# Altium PCB PCB_POWER.PcbDoc (part 3 of 3)
Units mil, origin at the board's own origin, x right, y up, seen from the top; angles counter-clockwise.
Board outline 4410 x 2400 mil, 2 copper layers (Top Layer, Bottom Layer), stack 65.792 mil thick; 97 components, 67 nets, 301 pads, 107 vias.
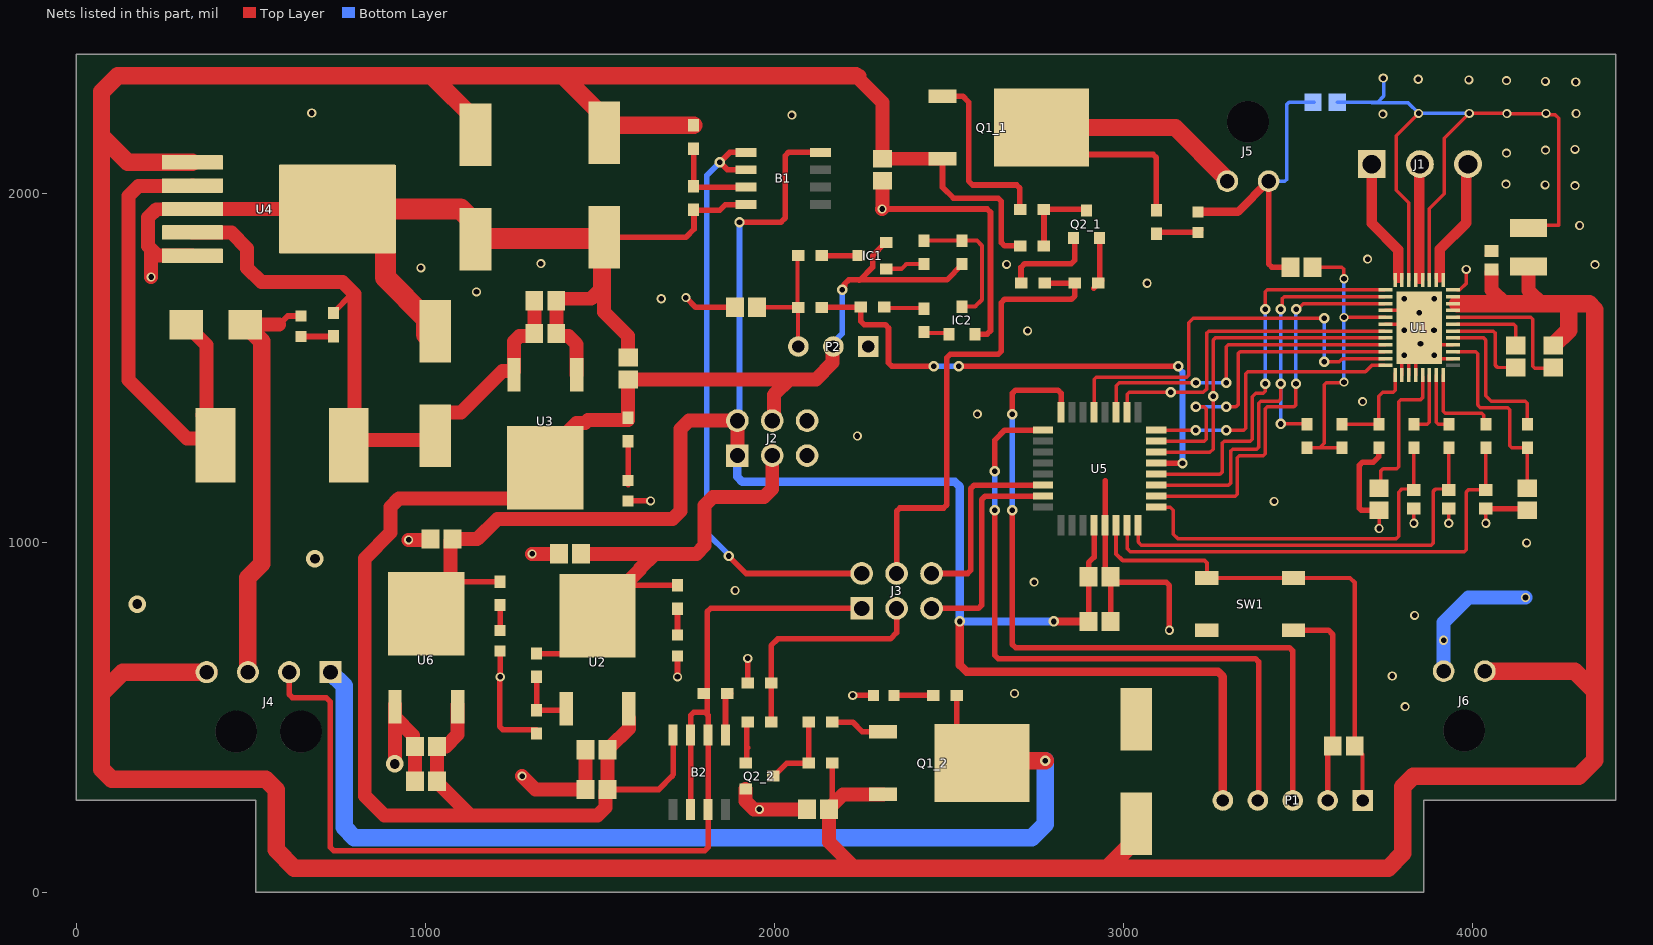
[diagram p2: the nets of this part, all layers, seen from the top]

## Via types
v1: diameter 26, hole 16, Top Layer to Bottom Layer, tented both sides, 70 vias
v2: diameter 30, hole 16, Top Layer to Bottom Layer, 32 vias
v3: diameter 50, hole 28, Top Layer to Bottom Layer, tented both sides, 3 vias
v4: diameter 26, hole 16, Top Layer to Bottom Layer, 2 vias

## Nets (pads, with @x,y where several pads share a name; then routed paths per layer and width w, separated by ;. In a path a pad name is that pad's centre, name@x,y a point inside that pad or via, vN(x,y) a via of type N, cw(c..) or ccw(c..) an arc to the next point about the centre after c; other vN are vias at no path point)
3V: C13.1 J2.3 R9.2 R10.2 U2.4 | length 1493.1
  Top Layer w16: R10.2@1318.9,683.12 1392.25,683.12 1493.5,784.37 U2.4@1493.5,791.39 ; U2.4@1525,879.38 1525.98,878.4 R9.2@1722.49,878.4
  Top Layer w40: C13.1@1446.26,968.75 1657.87,968.75 ; U2.4@1493.5,791.39 1525,822.88 1525,879.38 1571.26,879.38 1615.52,923.64 1615.52,926.4 1657.87,968.75 ; J2.3@1993.75,1261.53 1993.75,1154.68 1970.32,1131.25 1823.43,1131.25 1800,1107.82 1800,992.18 1776.57,968.75 1657.87,968.75
3V3: B1.8 C16.1 C27.2 C28.2 J2.1 J2.2 P1.5 R12.2 U5.4 U6.4 | length 5450
  Top Layer w16: U6.4@1056.82,875.21 1070.89,889.28 1198.66,889.28 ; v2(1900,1918.75) 2018.75,1918.75 2031.25,1931.25 2031.25,2109.38 2040.62,2118.75 B1.8@2131.73,2118.75 ; C28.2@2899.75,774.99 2899.75,887.5 2899.75,943.75 2915.5,959.5 U5.4@2915.5,1050.5
  Top Layer w24: v2(2531.25,775) 2531.25,650 2550,631.25 3270.44,631.25 3284.5,617.19 P1.5@3284.5,270.29 ; v2(2800,775) C28.2@2899.9,774.99
  Top Layer w40: U6.4@1070.89,889.28 1072.28,890.68 1072.28,1005.3 C16.1@1077.87,1010.89 1148.92,1010.89 1206.34,1068.31 1707.82,1068.31 1731.25,1091.74 1731.25,1326.57 1754.68,1350 J2.2@1893.75,1350 J2.1@1893.75,1237.52
  Bottom Layer w16: v2(1900,1918.75) 1900,1363.31 J2.2@1909.37,1353.94
  Bottom Layer w24: J2.1@1893.75,1250 1893.75,1189.06 1907.81,1175 2517.19,1175 2531.25,1160.94 v2(2531.25,775) v2@2798.38,775
5V: B2.4 C11.1 C12.1 C14.1 C15.1 C19.1 IC1.2 J2.4 P2.2 R13.2 R20.2 U2.3 U3.4 U6.3 | length 5000.1
  Top Layer w16: C11.1@1521.8,293.75 1668.77,293.75 1707.2,332.18 ; 1709.99,337.5 B2.4@1709.99,450.48 B2.4@1709.99,462.98 ; v2(2193.75,1725) 2193.75,1728.79 2200.6,1735.64 2200.6,1741.3 2212.85,1753.54 2245.2,1753.54 ; 2243.45,1751.8 2245.2,1753.54 ; IC1.2@2320.47,1859.84 2318.5,1859.84 2281.1,1822.44 2281.1,1789.44 2245.2,1753.54 ; R20.2@2537.5,1798.82 2537.5,1796.85 2494.19,1753.54 2245.2,1753.54
  Top Layer w40: U6.3@1092.39,535.74 1092.39,450.65 1058.88,417.14 C15.1@1034.12,417.14 C14.1@1034.12,317.14 1034.12,315.17 1092.39,256.9 1092.39,255.91 1129.45,218.85 ; U2.3@1583.27,496.82 1583.27,469.03 1529.36,415.12 1527.39,415.12 1521.8,409.53 C12.1@1521.8,407.56 C11.1@1521.8,293.75 1516.21,288.16 1516.21,242.28 1492.78,218.85 1129.45,218.85 ; J2.4@1993.75,1350 1998.53,1354.78 1998.53,1424.39 2042.64,1468.5 ; P2.2@2166.88,1562.5 2166.88,1516.88 2118.5,1468.5 2042.64,1468.5 ; 1129.45,218.85 883.51,218.85 826.77,275.59 826.77,955.26 900.68,1029.17 900.68,1103.42 924.11,1126.85 1265.39,1126.85 1343.75,1205.22 U3.4@1343.75,1214.86 1343.75,1254.43 1433,1343.68 1457.61,1343.68 1466.14,1352.21 1581.25,1352.21 R13.2@1581.25,1358.46 C19.1@1581.25,1468.5 2042.64,1468.5
  Bottom Layer w16: P2.2@2168.75,1562.5 2168.75,1574.15 2193.75,1599.15 v2(2193.75,1725)
12V: C17.1 C18.1 C20.1 L1.2 R14.2 U3.3 U4.4 | length 1881
  Top Layer w16: R14.2@737.5,1658.46 737.5,1660.43 789.57,1712.5 796.95,1712.5
  Top Layer w40: U4.4@333.22,1889.32 333.89,1888.65 445.06,1888.65 489.96,1843.75 489.96,1787.89 531.25,1746.6 762.84,1746.6 796.95,1712.5 L1.2@796.95,1316.44 ; L1.2@781.07,1279.64 796.28,1294.84 C20.1@1034.21,1294.84 ; C20.1@1037.83,1308.9 1037.83,1357.09 1054.05,1373.31 1102.25,1373.31 1220.71,1491.77 1253.08,1491.77 1253.99,1492.68 1253.99,1576.57 1269.86,1592.44 1306.66,1592.44 1312.25,1598.03 C18.1@1312.25,1600 C17.1@1312.25,1693.75 C17.1@1312.25,1699.31
AVDD: C8.1 R8.2 R27.2 U1.25 | length 879.2
  Top Layer w10: R27.2@3525,1272.79 3562.5,1272.79 ; C8.1@3541.1,1789.79 3625.32,1789.79 3631.17,1783.93 v4(3631.17,1756.5) ; R8.2@3625,1272.79 3562.5,1272.79 ; v1(3631.17,1460.5) 3629.3,1458.63 3580.86,1458.63 3575,1452.77 3575,1285.29 3562.5,1272.79 ; v4(3631.17,1646.03) U1.25@3749.9,1646.03
  Bottom Layer w10: v1(3631.17,1460.5) v4(3631.17,1646.03) v4(3631.17,1756.5)
BLDC_E: R23.1 R24.1 U5.13 | length 1517.4
  Top Layer w16: R23.1@2133.46,1675 R24.1@2231.25,1675 ; R24.1@2247.64,1675 2247.64,1634.37 2257.01,1625 2317.35,1625 2326.73,1615.63 2326.73,1515.62 2336.1,1506.25 v2(2456.59,1506.25) ; v2(2527.66,1506.25) v2(3156.25,1506.25) ; U5.13@3093.25,1228.25 v2(3168.75,1228.25)
  Bottom Layer w16: v2(2456.59,1506.25) v2(2527.66,1506.25) ; v2(3156.25,1506.25) 3156.25,1502.46 3168.75,1489.96 v2(3168.75,1228.25)
DRVOUT: C29.2 P2.3 R21.2 R23.2 | length 377.1
  Top Layer w12: C29.2@1950.25,1675 R23.2@2066.54,1675 ; R21.2@2066.54,1822.44 R23.2@2066.54,1675 ; P2.3@2068.75,1562.5 2067.64,1563.61 2067.64,1673.89 R23.2@2066.54,1675
FAULT: R27.1 U1.22 U5.11 | length 1360.6
  Top Layer w10: U5.11@3093.25,1165.26 3300.39,1165.26 3306.25,1171.11 3306.25,1262.89 3312.11,1268.75 3381.64,1268.75 3387.5,1274.61 3387.5,1400.39 3393.36,1406.25 3444.14,1406.25 3450,1412.11 v2(3450,1456.25) ; v2(3450,1340.7) 3524.02,1340.7 R27.1@3525,1339.71 ; v2(3450,1669.71) 3453.83,1673.53 3453.83,1699.25 3459.68,1705.11 U1.22@3745.9,1705.11
  Bottom Layer w10: v2(3450,1340.7) v2(3450,1456.25) v2(3450,1669.71)
FB_BK: C1.1 R4.2 U1.3 | length 576.4
  Top Layer w10: U1.3@3956.25,1547.59 4008.02,1547.59 4013.88,1541.73 4013.88,1395.06 4021.44,1387.5 4100.39,1387.5 4106.25,1381.64 4106.25,1278.64 4112.11,1272.79 R4.2@4156.25,1272.79 C1.1@4156.25,1156.5
GND: *5.2 B1.4 C1.2 C6.1 C7.1 C8.2 C9.2 C10.1 C11.2 C12.2 C13.2 C14.2 C15.2 C16.2 C17.2 C18.2 C19.2 C20.2 C21.2 C22.2 C23.2 C25_1.2 C25_2.2 C26.1 C27.1 C28.1 C29.1 D1.2 D2.2 D3.2 D4.1 D5.2 D6_1.2 D6_2.2 IC2.2 J2.5 J2.6 J4.3 J5.2 J6.2 P1.2 P2.1 Q2_1.2 Q2_2.2 R2.1 R11.2 R19_1.2 R19_2.2 R26.2 SW1.3 SW1.4 U1.2 U1.4 U1.24 U1.26 U1.34 U1.35 U1.36 U1.41 U3.1 U4.3 U4.5 U4.6 U5.5 U6.1 | length 11484.1
  Top Layer w10: v1(3731.95,1041.39) C9.2@3731.95,1091.77 ; U1.26@3749.9,1626.34 U1.41@3836.56,1626.34 ; U1.24@3749.9,1665.72 3797.18,1665.72 U1.41@3836.56,1626.34 ; U1.34@3797.18,1480.5 3797.18,1567.28 U1.41@3816.87,1586.97 ; U1.35@3816.87,1480.5 U1.41@3816.87,1586.97 ; v1(3831.25,1056.25) C10.1@3831.25,1098.43 ; U1.36@3836.56,1480.5 3836.56,1606.66 U1.41@3816.87,1586.97 ; v1(3931.25,1056.25) C7.1@3931.25,1098.43 C7.1@3931.25,1100.93 ; U1.2@3942.9,1527.89 3906.4,1527.89 3846.4,1587.89 U1.41@3846.4,1616.5 ; U1.4@3942.9,1567.28 3895.63,1567.28 U1.41@3846.4,1616.5 ; C6.1@4030.77,1086.52 4036.76,1086.52 4037.56,1085.71 v1(4037.56,1056.25) ; U1.41@3836.56,1626.34 U1.41@3846.4,1616.5
  Top Layer w16: 581.25,1625 606.25,1650 D5.2@643.75,1650 ; v1@1213.02,607.01 1213.02,474.3 1222.39,464.92 R11.2@1317.79,464.92 ; v1(1214.73,616.45) D2.2@1214.73,686.02 ; C23.2@1512.5,1875.39 1746.36,1875.39 1769.73,1898.77 1769.73,1953.05 1843.75,1953.05 1859.45,1968.75 B1.4@1918.27,1968.75 ; D3.2@1578.25,1120.18 D3.2@1581.25,1120.18 v1(1645.4,1120.18) ; v1(1722.49,616.39) D1.2@1722.49,670.47 ; v1(1746.36,1702.56) 1773.92,1675 C29.1@1887.25,1675 ; R19_2.2@1923.52,598.38 v1(1923.52,669.29) ; v1(2224.41,563.43) D6_2.2@2283.76,563.43 ; v1(2308.66,1956.25) 2609.38,1956.25 2618.75,1946.88 2618.75,1607.5 2609.38,1598.13 IC2.2@2574.9,1598.13 ; R19_1.2@2914.06,1728.76 2929.06,1743.76 2929.18,1743.76 2936.93,1751.51 2936.93,1751.63 2931.15,1745.85 Q2_1.2@2931.15,1873.13 ; 2947,1178.25 U5.5@2947,1050.5 2947,903.25 C27.1@2962.75,887.5 ; C28.1@2975.24,774.99 2962.75,762.5 C27.1@2962.75,887.5 ; v1(3131.25,750) 3131.25,878.13 3121.88,887.5 C27.1@2962.75,887.5 ; J5.2@3415.31,2036.17 3415.31,1799.17 3424.68,1789.79 C8.2@3460.29,1789.79 ; SW1.3@3486.52,750.2 3586.65,750.2 3599.12,737.73 C26.1@3599.12,418.7 3584.5,404.08 P1.2@3584.5,262.45 ; C9.2@3731.25,1093.5 3681.14,1093.5 3675,1099.64 3675,1221.88 3684.37,1231.25 3715.31,1231.25 3731.25,1247.19 R26.2@3731.25,1272.79 ; C6.1@4037.5,1098.43 4151.33,1098.43 C1.2@4156.25,1093.5
  Top Layer w24: D6_1.2@3213.48,1948.28 3327.41,1948.28 J5.2@3415.31,2036.17
  Top Layer w40: v1(215.09,1761.58) 215.09,1841.16 ; U4.5@333.22,1822.39 332.55,1823.06 233.19,1823.06 215.09,1841.16 ; D4.1@485.33,1625 490.55,1625 581.25,1625 ; U4.6@748.57,1956.25 U4.3@333.22,1956.25 332.55,1955.58 229.68,1955.58 206.25,1932.15 206.25,1850 215.09,1841.16 ; v3(912.86,367.14) U6.1@912.86,501.54 ; U6.1@912.86,535.74 U6.1@912.86,501.54 ; v1(952.63,1008.92) 1012.91,1008.92 C16.2@1014.88,1010.89 ; C14.2@971.13,317.14 C15.2@971.13,417.14 965.54,422.73 965.54,448.86 U6.1@912.86,501.54 ; v1(1277.63,332.2) 1316.08,293.75 C11.2@1458.81,293.75 C12.2@1458.81,407.56 ; v1(1306.25,968.75) C13.2@1383.27,968.75 C13.2@1388.86,974.34 ; U3.1@1433.51,1481.79 1433.51,1569.01 1410.08,1592.44 1380.84,1592.44 1375.25,1598.03 C18.2@1375.25,1600 C17.2@1375.25,1693.75 1375.25,1699.31 1474.31,1699.31 1500.83,1725.83 1500.83,1863.72 1509.38,1872.27 C23.2@1512.5,1875.39 1512.5,1661.19 1581.25,1592.44 C19.2@1581.25,1531.5 ; Q2_2.2@1917.62,294.78 1917.62,260.45 1941.05,237.02 v1(1956.99,237.02) 2093.02,237.02 C25_2.2@2093.5,237.5 ; v1(2308.66,1956.25) 2309.83,1957.42 C25_1.2@2309.83,2037.25
  Top Layer w50: D4.1@484.65,1625 D4.1@485.33,1625 ; D4.1@490.55,1625 507.87,1607.68 507.87,1601.77 531.5,1578.15 531.5,939.99 492.13,900.62 J4.3@492.13,629.79
  Top Layer w60: U4.6@748.57,1956.25 U4.6@788.93,1956.25 ; C20.2@1004.22,1596.95 1004.22,1641.24 885.9,1759.56 885.9,1859.28 U4.6@788.93,1956.25 ; C23.2@1509.38,1872.27 1146.88,1872.27 C21.2@1143.75,1869.14 1143.75,1913.44 1100.94,1956.25 U4.6@788.93,1956.25
  Bottom Layer w10: J5.2@3415.31,2036.17 3462.01,2036.17 3467.86,2042.03 3467.86,2256.71 3473.72,2262.57 *5.2@3542.5,2262.57 *5.2@3546.25,2262.57
  Bottom Layer w40: J6.2@3916.57,622.42 J6.2@3916.57,632.58 v1(3916.57,721.25) 3916.57,772.07 3988.26,843.75 v1(4151.05,843.75)
  other v1: 3806.25,531.25 2687.5,568.75 3769.45,618.75 3833.43,792.5 1887.5,863.63 2743.75,887.5 4154.05,1000 3431.25,1118.75 2237.5,1306.25 2581.25,1368.75 3684.37,1404.61 3803.4,1537.45 3889.63,1536.89 3850.4,1570.89 2725,1607.5 3803.9,1609 3888.9,1609 3846.4,1659 1675.89,1699.31 3803.9,1699.11 3889.63,1699.11 1146.88,1719 3067.6,1743.76 987.5,1787.5 2665.1,1797.83 1331.25,1800 2050,2225 675,2231.25
  other v3: 175,825 683.88,954.64
HUM: J4.1 Q1_2.2 R17_2.1 | length 3085.4
  Top Layer w16: R17_2.1@2521.75,563.43 2521.75,442.42 Q1_2.2@2594.49,369.68
  Top Layer w50: Q1_2.2@2594.49,369.68 2600.74,375.93 v2(2775.74,375.93)
  Bottom Layer w50: J4.1@728.35,629.79 767.72,590.42 767.72,185.54 797.01,156.25 2737.5,156.25 2775,193.75 v2@2775,375.93
ILIM: C9.1 U1.37 | length 426.6
  Top Layer w10: C9.1@3737.11,1154.43 3737.11,1161.32 3737.11,1206.64 3742.96,1212.5 3781.64,1212.5 3787.5,1218.36 3787.5,1404.61 3793.36,1410.47 3850.39,1410.47 3856.25,1416.33 U1.37@3856.25,1475.61
MODE: R8.1 R26.1 U1.33 | length 289
  Top Layer w10: R8.1@3625,1339.71 R26.1@3731.25,1339.71 3731.25,1420.18 3742.32,1431.25 3771.63,1431.25 3777.49,1437.11 U1.33@3777.49,1486.12
NetB1_3: B1.3 R1.1 R2.2 | length 258.5
  Top Layer w16: R1.1@1768.75,2129.04 R2.2@1768.75,2020.96 1770.96,2018.75 B1.3@1918.27,2018.75
NetB2_1: B2.1 R3.2 | length 128.5
  Top Layer w16: B2.1@1859.99,450.48 1859.99,561.05 1867.69,568.75 R3.2@1874.7,568.75
NetC2_1: C2.1 U1.7 | length 224.1
  Top Layer w10: U1.7@3956.25,1626.34 4116.98,1626.34 4122.83,1620.49 C2.1@4122.83,1565.39
NetC2_2: C2.2 U1.6 | length 264
  Top Layer w10: U1.6@3956.25,1606.66 4059.2,1606.66 4065.06,1600.8 4065.06,1508.26 4070.92,1502.4 C2.2@4122.83,1502.4
NetC6_2: C6.2 R5.2 U5.7 | length 1383.8
  Top Layer w10: U5.7@3009.99,1050.5 3009.99,984 3018.99,975 3975.39,975 3981.25,980.86 3981.25,1145.72 3987.11,1151.57 C6.2@4037.5,1151.57 ; C6.2@4037.56,1156.4 R5.2@4037.56,1272.79
NetC7_2: C7.2 R6.2 U5.8 | length 1218.4
  Top Layer w10: U5.8@3041.49,1050.5 3041.49,1002.75 3050.49,993.75 3112.5,993.75 3881.25,993.75 3887.5,1000 3887.5,1148.57 3893.36,1154.43 C7.2@3933.56,1154.43 ; C7.2@3931.25,1151.57 R6.2@3931.25,1272.79
NetC10_2: C10.2 R7.2 U5.9 | length 1069.1
  Top Layer w10: U5.9@3093.25,1102.26 3133.25,1102.26 3142.25,1093.26 3142.25,1025 3154.75,1012.5 3781.25,1012.5 3787.5,1018.75 3787.5,1144.94 3796.99,1154.43 C10.2@3831.25,1154.43 ; C10.2@3831.25,1151.57 R7.2@3831.25,1272.79
NetD1_1: D1.1 R9.1 | length 75.7
  Top Layer w16: D1.1@1722.49,735.78 R9.1@1722.49,811.47
NetD2_1: D2.1 R12.1 | length 77.3
  Top Layer w16: D2.1@1214.73,750.64 R12.1@1214.73,827.92
NetD3_1: D3.1 R13.1 | length 123.5
  Top Layer w16: D3.1@1581.25,1167.03 R13.1@1581.25,1290.55
NetD4_2: D4.2 L1.1 U4.2 | length 1503.4
  Top Layer w40: D4.2@315.35,1625 321.26,1625 343.58,1602.68 343.58,1596.77 374.02,1566.34 L1.1@374.02,1292.92 ; U4.2@333.22,2023.18 332.55,2022.51 178.76,2022.51 150,1993.75 150,1466.43 317.22,1299.21 362.1,1299.21 L1.1@399.18,1279.64 ; L1.1@362.1,1365.94 406.28,1321.75 L1.1@406.28,1286.74
NetD5_1: D5.1 R14.1 | length 94
  Top Layer w16: D5.1@643.75,1590.94 644.05,1591.24 737.2,1591.24 R14.1@737.5,1591.54
"NetD6_U_PowerOut 11_1": D6_1.1 R17_1.2 | length 130.8
  Top Layer w16: R17_1.2@3093.75,1889.22 D6_1.1@3213.48,1889.22 ; D6_1.1@3213.69,1889.02 3213.69,1889.42 D6_1.1@3221.23,1896.97
"NetD6_U_PowerOut 12_1": D6_2.1 R17_2.2 | length 112
  Top Layer w16: D6_2.1@2342.81,563.43 R17_2.2@2454.82,563.43
NetIC1_1: IC1.1 R22.2 | length 114.3
  Top Layer w12: IC1.1@2320.47,1785.04 2363.97,1785.04 2377.75,1798.82 R22.2@2429.04,1798.82
NetIC1_3: IC1.3 R21.1 | length 108.3
  Top Layer w16: R21.1@2135.16,1822.44 IC1.3@2243.45,1822.44
NetIC2_1: IC2.1 R25.2 | length 73.5
  Top Layer w12: R25.2@2429.04,1604.04 2431.99,1601.08 2497.15,1601.08 IC2.1@2500.1,1598.13
NetIC2_3: IC2.3 R20.1 R22.1 | length 391.3
  Top Layer w12: R22.1@2429.04,1865.75 R20.1@2537.5,1865.75 2579.82,1865.75 2594.59,1850.98 2594.59,1696.56 2574.9,1676.87 IC2.3@2537.5,1676.87
NetJ5_1: J5.1 Q1_1.2 R17_1.1 | length 1230.4
  Top Layer w16: Q1_1.2@2703.05,2189.73 2780.28,2112.5 3084.38,2112.5 3093.75,2103.13 R17_1.1@3093.75,1957.66
  Top Layer w50: Q1_1.2@2703.05,2189.73 3147.77,2189.73 3291.19,2046.31 3291.19,2045.42 J5.1@3298.21,2038.4
"NetQ1_U_PowerOut 11_1": Q1_1.1 R16_1.2 | length 517.3
  Top Layer w16: Q1_1.1@2481.25,2279.49 2539.26,2279.49 2556.25,2262.5 2556.25,2036.45 2567.7,2025 2693.68,2025 2703.05,2015.63 R16_1.2@2703.05,1961.81
"NetQ1_U_PowerOut 12_1": Q1_2.1 R16_2.2 | length 157.1
  Top Layer w16: R16_2.2@2165.45,486.61 2224.41,486.61 2251.97,459.06 2310.63,459.06 Q1_2.1@2311.02,459.45
"NetQ2_U_PowerOut 11_1": Q2_1.1 R18_1.2 | length 272.1
  Top Layer w16: R18_1.2@2706.25,1743.76 2706.25,1789.29 2716.97,1800 2850.33,1800 2859.7,1809.37 Q2_1.1@2859.7,1874.21
"NetQ2_U_PowerOut 11_3": Q2_1.3 R15_1.2 R16_1.1 | length 228.5
  Top Layer w16: R15_1.2@2771.95,1848.88 2771.95,1955.59 Q2_1.3@2893.75,1955.59
"NetQ2_U_PowerOut 12_1": Q2_2.1 R18_2.2 | length 121.4
  Top Layer w16: Q2_2.1@1917.62,369.59 1920.57,372.54 1920.57,483.66 R18_2.2@1923.52,486.61 ; 1921.9,413.34 1923.87,413.34
"NetQ2_U_PowerOut 12_3": Q2_2.3 R15_2.2 R16_2.1 | length 234.6
  Top Layer w16: Q2_2.3@1996.36,332.18 1998.33,332.18 2034.89,368.75 2097.59,368.75 R15_2.2@2098.52,369.68 R16_2.1@2098.52,486.61
NetR10_1: R10.1 R11.1 U2.1 | length 181.7
  Top Layer w16: R10.1@1318.9,616.19 R11.1@1318.9,520.96 1399.85,520.96 U2.1@1403.74,524.85
NetR24_2: R24.2 R25.1 | length 116.1
  Top Layer w12: R24.2@2314.57,1675 2316.58,1672.98 2427.02,1672.98 R25.1@2429.04,1670.96
NetU1_21: U1.21 U5.12 | length 1158
  Top Layer w10: U5.12@3093.25,1196.75 3276.08,1196.75 3281.94,1202.61 3281.94,1285.38 3287.8,1291.24 3362.89,1291.24 3368.75,1297.1 3368.75,1418.75 3378.12,1428.12 3400.23,1428.12 3406.09,1433.98 3406.09,1456.09 v2(3406.25,1456.25) ; v2(3406.25,1669.71) 3406.25,1718.94 3412.11,1724.8 U1.21@3745.9,1724.8
  Bottom Layer w10: v2(3406.25,1456.25) v2(3406.25,1669.71)
NetU1_23: U1.23 U5.10 | length 1177.9
  Top Layer w10: U5.10@3093.25,1133.76 3319.14,1133.76 3325,1139.62 3325,1244.14 3330.86,1250 3400.23,1250 3406.09,1255.86 3406.09,1383.64 3411.95,1389.5 3487.89,1389.5 3493.75,1395.36 v2(3493.75,1456.25) ; v2(3493.9,1669.71) 3499.31,1669.71 3515.02,1685.41 U1.23@3745.9,1685.41
  Bottom Layer w10: v2(3493.75,1456.25) 3493.75,1669.56 v2(3493.9,1669.71)
NetU1_27: U1.27 U5.18 | length 956
  Top Layer w10: U5.18@3009.99,1374.5 3009.99,1425.39 3015.85,1431.25 v2(3134.65,1431.25) 3228.58,1431.25 3237.5,1440.17 3237.5,1600.8 3243.36,1606.66 U1.27@3745.9,1606.66
NetU1_28: U1.28 U5.14 | length 975.2
  Top Layer w10: U5.14@3093.25,1259.74 3247.24,1259.74 3256.25,1268.75 v2(3256.25,1420.07) 3256.25,1581.11 3262.11,1586.97 U1.28@3749.9,1586.97
NetU1_29: U1.29 U5.19 | length 956.6
  Top Layer w10: U5.19@2978.49,1374.5 2978.49,1450.39 2987.1,1459 3206.62,1459 v2(3207.26,1458.37) ; v2(3293.75,1458.37) 3293.75,1561.42 3299.61,1567.28 U1.29@3749.9,1567.28
  Bottom Layer w10: v2(3207.26,1458.37) v2(3293.75,1458.37)
NetU1_30: U1.30 U5.15 | length 953.8
  Top Layer w10: U5.15@3093.25,1291.24 3230.68,1291.24 3236.54,1297.1 3236.54,1383.64 3230.68,1389.5 v2(3207.26,1389.5) ; v2(3293.75,1389.5) 3321.84,1389.5 3327.69,1395.36 3327.69,1541.73 3333.55,1547.59 U1.30@3745.9,1547.59
  Bottom Layer w10: v2(3207.26,1389.5) v2(3293.75,1389.5)
NetU1_31: U1.31 U5.21 | length 1214
  Top Layer w10: U5.21@2915.5,1374.5 2915.5,1469.14 2921.36,1475 3181.27,1475 3187.12,1480.86 3187.12,1630.88 3199.96,1643.71 v2(3575,1643.71) ; v2(3575,1518.75) 3617.91,1518.75 3627.06,1527.89 U1.31@3745.9,1527.89
  Bottom Layer w10: v2(3575,1518.75) v2(3575,1643.71)
NetU1_32: U1.32 U5.16 | length 821
  Top Layer w10: U5.16@3093.25,1322.74 v2(3206.62,1322.74) ; v2(3293.75,1323.1) 3294.11,1322.74 3344.14,1322.74 3350,1328.59 3350,1484.25 3355.86,1490.11 3692.72,1490.11 3710.82,1508.2 U1.32@3745.9,1508.2
  Bottom Layer w10: v2(3206.62,1322.74) 3206.81,1322.92 3293.57,1322.92 v2(3293.75,1323.1)
OA: J1.3 U1.13 U1.14 | length 354.4
  Top Layer w30: 3905.63,1761.5 3905.63,1840.63 3981.25,1916.25 J1.3@3981.25,2084.6
OB: J1.2 U1.16 U1.17 | length 329.6
  Top Layer w30: 3846.4,1756.5 J1.2@3846.4,2086.11
OC: J1.1 U1.19 U1.20 | length 356.7
  Top Layer w30: J1.1@3710.82,2085 3710.82,1915.02 3786.9,1838.95 3786.9,1759.82
PGND: *5.1 C3.1 C4.2 U1.12 U1.15 U1.18 | length 2296.8
  Top Layer w10: 3781.25,2048.57 3781.25,2009.7 3816.87,1974.08 U1.18@3816.87,1752.5 ; 3781.25,2048.61 3781.25,2166.25 v1(3845,2230) ; U1.15@3875.94,1752.5 3875.94,1957.19 3918.75,2000 3918.75,2158.75 v1(3990,2230) 4097.53,2230 4097.82,2229.71 4209.36,2229.71 v1(4209.65,2230) 4212.71,2226.94 4234.78,2226.94 4245.86,2215.86 4245.86,1909.18 ; U1.12@3956.25,1724.8 3963.13,1724.8 3981.25,1742.91 v1(3981.25,1783.43) ; C4.2@4038.88,1823.32 C4.2@4040.88,1825.32 ; C3.1@4130,1885.71 4154.25,1909.96 4245,1909.96
  Bottom Layer w10: *5.1@3612.5,2262.57 3727.57,2262.57 3745,2280 3745,2330 v1(3743.75,2331.25) ; 3710,2260 3815,2260 v1(3845,2230) v1(3990,2230)
  other v1: 4350,1797.08 3698.82,1812.82 4306.1,1909.18 4292.92,2023.45 4207.22,2025.44 4095.32,2027.43 4096.61,2116.43 4208.43,2125.13 4292.92,2127.1 3742.54,2228.01 4097.53,2229.43 4296.1,2229.75 4294.89,2320.04 4208.15,2322.03 4096.61,2324.02 3988.79,2326.01 3843.79,2328.01
PW_F: J3.4 R18_1.1 R19_1.1 | length 1410.3
  Top Layer w16: J3.4@2350,896.91 2350,1090.63 2359.37,1100 2484.38,1100 2493.75,1109.37 2493.75,1530.69 2503.12,1540.06 2640.63,1540.06 2650,1549.43 2650,1688.41 2659.37,1697.79 2850.91,1697.79 2860.29,1707.16 R19_1.1@2860.29,1743.76 R18_1.1@2774.16,1743.76
PW_H: J3.3 R18_2.1 R19_2.1 | length 663.7
  Top Layer w16: R18_2.1@1990.45,486.61 R19_2.1@1990.45,598.38 1990.45,705.86 2009.6,725 2331.99,725 2350,743.01 J3.3@2350,812.5
RST: C26.2 P1.1 SW1.1 SW1.2 U5.6 | length 1457.9
  Top Layer w12: U5.6@2978.49,1050.5 2978.49,968.5 2997.48,949.51 3231.45,949.51 3238.48,942.48 SW1.2@3238.48,899.8 3648.85,899.8 3662.11,886.54 3662.11,416.73 3684.5,394.34 P1.1@3684.5,262.45
RX: J3.5 U5.31 | length 629.5
  Top Layer w16: J3.5@2450,812.5 2584.38,812.5 2593.75,821.87 2593.75,1124.39 2603.12,1133.76 U5.31@2769.25,1133.76
SENT: B2.2 B2.3 B2.6 B2.7 J3.1 J4.2 R3.1 | length 3157.7
  Top Layer w16: J4.2@610.24,629.79 610.24,566.52 619.61,557.15 715.97,557.15 728.35,544.77 728.35,128.12 737.72,118.75 1800.62,118.75 1809.99,128.12 B2.7@1809.99,237.02 B2.2@1809.99,444.95 ; B2.6@1759.99,237.02 B2.3@1759.99,450.48 1759.99,506.18 1769.36,515.55 1800.62,515.55 1807.78,508.39 ; R3.1@1807.73,568.8 1807.73,803.13 1817.1,812.5 J3.1@2270.92,812.5 ; R3.1@1807.78,568.75 1807.78,515.55 1807.78,508.39 ; B2.2@1809.99,450.48 1809.99,506.18 1807.78,508.39
SENV: B1.1 B1.2 J3.2 | length 1754.8
  Top Layer w16: v2(1868.75,962.5) 1918.75,912.5 J3.2@2263.88,912.5 ; B1.2@1918.27,2068.75 1865.29,2068.75 v2(1843.75,2090.29) 1872.21,2118.75 B1.1@1918.27,2118.75
  Bottom Layer w16: v2(1843.75,2090.29) 1806.25,2052.79 1806.25,1028.79 1868.75,966.29 v2(1868.75,962.5)
SOA: R5.1 U1.40 | length 253.7
  Top Layer w10: U1.40@3915.32,1479.76 3915.32,1377.07 3921.17,1371.21 4025.71,1371.21 4031.56,1365.35 4031.56,1336.57 R5.1@4030.77,1335.78
SOB: R6.1 U1.39 | length 173.1
  Top Layer w10: U1.39@3895.63,1480.13 3895.63,1461.5 3895.26,1461.13 3895.26,1345.57 3901.12,1339.71 R6.1@3931.25,1339.71
SOC: R7.1 U1.38 | length 182
  Top Layer w10: R7.1@3831.25,1339.71 3870.08,1339.71 3875.94,1345.57 U1.38@3875.94,1480.5
SW_BK: R4.1 U1.5 | length 431.1
  Top Layer w10: U1.5@3956.25,1586.97 4031.71,1586.97 4037.56,1581.11 4037.56,1421.98 4053.35,1406.2 4150.39,1406.2 4156.25,1400.34 R4.1@4156.25,1339.71
SWDCLK: P1.4 U5.25 | length 1926.9
  Top Layer w16: v2(2631.25,1093.26) 2631.25,678.12 2640.62,668.75 3377.49,668.75 3386.87,659.38 P1.4@3386.87,261.95 ; v2(2631.25,1205.75) 2631.25,1294.48 2659.5,1322.74 U5.25@2769.25,1322.74
  Bottom Layer w16: v2(2631.25,1093.26) v2(2631.25,1205.75)
SWDIO: P1.3 U5.24 | length 2159.1
  Top Layer w16: v2(2681.25,1093.26) 2681.25,709.37 2690.62,700 3475.13,700 3484.5,690.63 P1.3@3484.5,262.45 ; v2(2681.25,1368.75) 2681.25,1428.13 2690.62,1437.5 2811.64,1437.5 2821.01,1428.13 U5.24@2821.01,1374.5
  Bottom Layer w16: v2(2681.25,1093.26) v2(2681.25,1368.75)
TX: J3.6 U5.30 | length 561
  Top Layer w16: J3.6@2450,912.5 2553.13,912.5 2562.5,921.87 2562.5,1155.88 2571.87,1165.26 U5.30@2769.25,1165.26
VCP: C5.2 U1.8 | length 445.3
  Top Layer w10: U1.8@3956.25,1646.03 4166.46,1646.03 4172.31,1640.18 4172.31,1506.29 4178.17,1500.43 4230.86,1500.43 C5.2@4253.42,1522.99
VIN: C3.2 C4.1 C5.1 C21.1 C22.1 C23.1 C25_1.1 C25_2.1 J4.4 J6.1 Q1_1.3 Q1_2.3 R1.2 R15_1.1 R15_2.1 U1.9 U1.10 U1.11 U4.1 | length 14059.3
  Top Layer w16: C25_2.1@2156.5,237.5 2165.45,246.46 2165.45,248.43 R15_2.1@2165.45,369.68 ; Q1_1.3@2481.25,2099.96 2481.25,2018.75 2512.5,1987.5 2640.63,1987.5 2650,1978.13 2650,1860.21 2659.37,1850.84 R15_1.1@2703.05,1850.84
  Top Layer w40: C25_2.1@2156.5,237.5 2156.5,143.5 2231.25,68.75 ; C25_2.1@2165.45,248.43 2196.63,279.61 2310.71,279.61 Q1_2.3@2311.02,279.92 ; 2243.75,2337.5 2233.56,2337.5 2309.83,2261.23 C25_1.1@2309.83,2100.25 Q1_1.3@2465.98,2100.25 ; C4.1@4053.56,1774.39 4053.56,1725 4093.56,1685 ; C3.2@4159.69,1791.46 4159.69,1723.49 4198.17,1685
  Top Layer w50: U4.1@333.22,2090.11 147.39,2090.11 72.83,2164.67 ; J4.4@380.11,629.79 J4.4@374.02,629.79 133.87,629.79 72.83,568.75 ; C21.1@1143.75,2168.36 1143.75,2212.65 1025,2331.4 1025,2337.5 ; R1.2@1768.75,2195.96 1535.43,2195.96 1393.9,2337.5 ; 2233.56,2337.5 1393.9,2337.5 ; C22.1@3036.42,195.87 3036.42,151.57 2953.59,68.75 ; U1.10@3956.25,1685 4093.56,1685 4198.17,1685 4275,1685 ; J6.1@4034.69,632.58 4292.42,632.58 4350,575 ; C5.1@4230.86,1565.39 4275,1609.53 4275,1685 ; 72.83,568.75 72.83,352.12 102.12,322.83 543.4,322.83 572.69,293.55 572.69,121.06 625,68.75 2231.25,68.75 2953.59,68.75 ; 72.83,568.75 72.83,2164.67 ; 72.83,2164.67 72.83,2291.58 118.75,2337.5 1025,2337.5 ; 1025,2337.5 1393.9,2337.5 ; 2953.59,68.75 3757.74,68.75 3800,111.01 3800,301.96 3829.29,331.25 4303.44,331.25 4350,377.81 4350,575 ; 4275,1685 4333.29,1685 4350,1668.29 4350,575
pads on no net: B1.5 B1.6 B1.7 B2.5 B2.8 J4. J5.3 J6.3 U1.1 U5.1 U5.2 U5.3 U5.17 U5.20 U5.22 U5.23 U5.26 U5.27 U5.28 U5.29 U5.32

## Polygon pours and split planes (outlines as drawn)
GND on Top Layer "GND_L01_P006" (solid, remove dead copper, pour order 6): 0,262.5 515,262.5 515,0 3860,0 3860,262.5 4410,262.5 4410,1722.37 3627.64,1722.37 3626.45,1878.08 3575,1878.08 3575,2400 0,2400
PGND on Top Layer "PGND_L01_P001" (solid, pour order 1): 3606.1,1906.25 3606.1,2405.29 4410,2405.29 4410,1744.82 3656.25,1744.78 3656.25,1906.25
PGND on Bottom Layer "PGND_L02_P008" (solid, pour order 8): 3612.5,1900.92 3662.65,1900.92 3662.65,1739.79 4410,1739.79 4410,2399.96 3612.5,2399.96
GND on Bottom Layer "GND_L02_P010" (solid, pour order 10): 0,2400 3587.26,2400 3587.26,1875 3637.53,1875 3639.44,1724.8 4410,1724.8 4410,262.5 3860,262.5 3860,0 515,0 515,262.5 0,262.5

## Silkscreen, mask and mechanical layers (free items; w line width, h text height)
Top Overlay:
  text "VIN" at 311.27,694.48 h32
  text "GND" at 426.18,694.48 h32
  text "SEN" at 548.13,693.89 h32
  text "HUM" at 666.88,694.48 h32
  text "3V3" at 3263.62,198.2 h32 r270
  text "SWC" at 3369.87,198.2 h32 r270
  text "SWI" at 3463.62,198.2 h32 r270
  text "GND" at 3571.69,198.2 h32 r270
  text "RST" at 3676.12,198.2 h32 r270
Bottom Overlay:
  lines w10: 1384.38,1300.05 1678.12,1300.05 ; 1488.12,1151.35 1488.12,1445.01 ; 1588.67,1150.64 1588.67,1444.22 ; 1736.25,697.16 2031.25,697.16 ; 1736.25,698.62 1736.25,998.62 2031.25,998.62 2031.25,698.62 ; 1736.25,850.52 2031.25,848.62 ; 1841.25,698.62 1841.25,992.37 ; 1941.25,698.62 1941.25,992.37 ; 1384.38,1150.64 1384.38,1190.1 1384.38,1444.73 1678.12,1444.73 1678.12,1150.64 1384.38,1150.64
  text "W" at 3685.86,1974.08 h32
  text "V" at 3825.6,1974.08 h32
  text "U" at 3960.27,1974.08 h32
  text "OUT" at 3350,1937.5 h32
  text "GND" at 3475,1937.5 h32
  text "OUT" at 2093.75,1625 h32 r90
  text "5V" at 2195.5,1625 h32 r90
  text "GND" at 2292.2,1625 h32 r90
  text "3V3" at 1409.92,1316.06 h32 r270
  text "5V0" at 1508.18,1315.64 h32 r270
  text "GND" at 1609.92,1310.64 h32 r270
  text "3V0" at 1508.18,1175.64 h32 r270
  text "GND" at 1609.92,1173.45 h32 r270
  text "3V3" at 1409.92,1170.64 h32 r270
  text "SENV" at 1765,857.37 h32 r270
  text "PWMF" at 1865,857.37 h32 r270
  text "TX" at 1964.51,857.28 h32 r270
  text "RX" at 1960.77,713.38 h32 r270
  text "VIN" at 3966.25,706.25 h32
  text "GND" at 4086.25,706.25 h32
  text "SENT" at 1763.72,701.25 h32 r270
  text "PWMH" at 1864.24,701.25 h32 r270
  text "VIN" at 407.55,686.48 h32
  text "GND" at 522.46,686.48 h32
  text "SEN" at 644.41,685.89 h32
  text "HUM" at 763.16,685.89 h32
Mechanical 1:
  the board outline again, w4

## Text inside footprints (layer, text, board x,y; h text height)
U1: Top Overlay "*" at 3996.4,1523.36 h32 r180; Top Assembly (Mech13) "*" at 3939.4,1523.36 h32 r180
U5: Top Overlay "*" at 2797.91,1000 h50 r90; Top Assembly (Mech13) "*" at 2830.27,1077 h50 r90